# Altium PCB AQM with ESP32-C3.PcbDoc
Units mil, origin at the board's own origin, x right, y up, seen from the top; angles counter-clockwise.
Board outline 3325 x 2600 mil, 2 copper layers (Top Layer, Bottom Layer); 60 components, 44 nets, 199 pads, 22 vias.
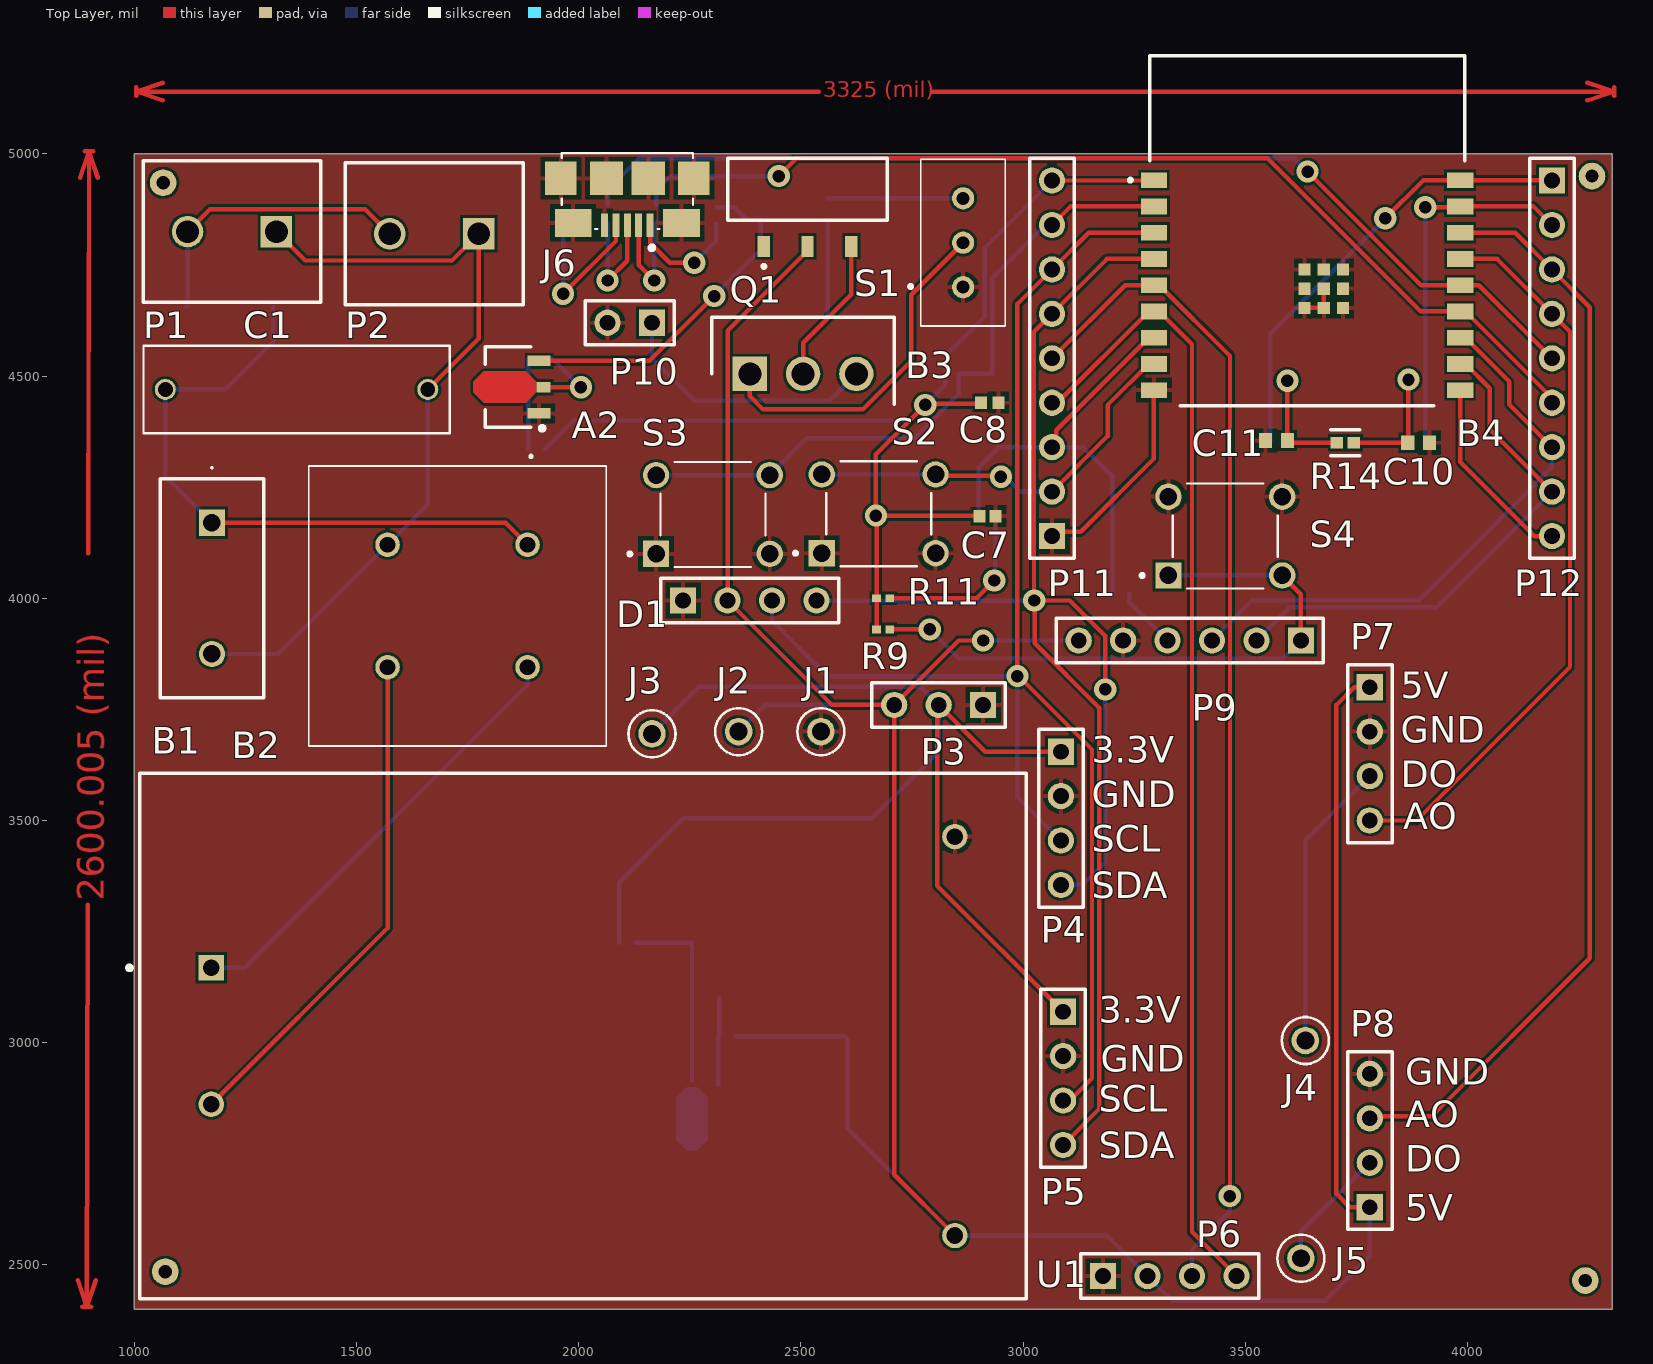
[diagram p0: Top Layer view]
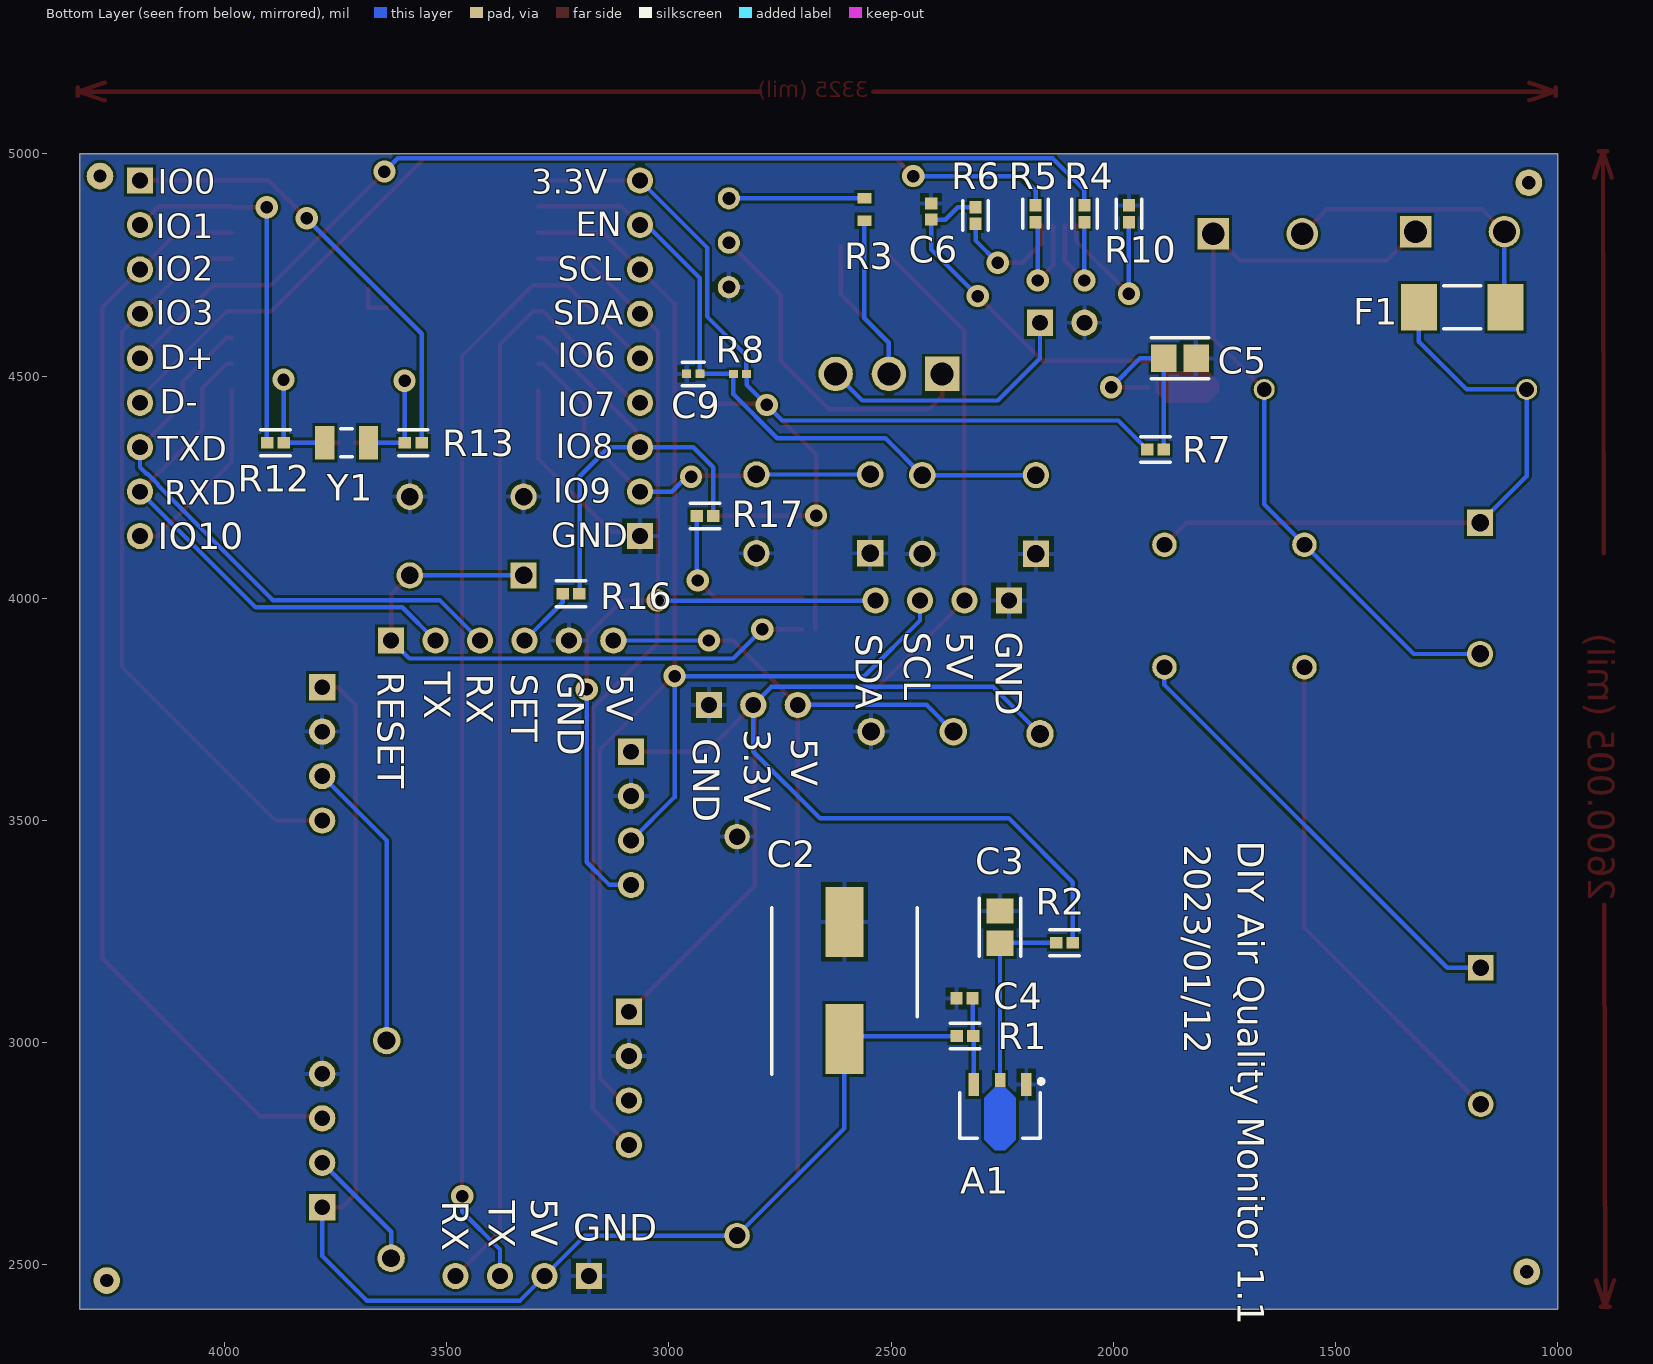
[diagram p1: Bottom Layer view, seen from below]
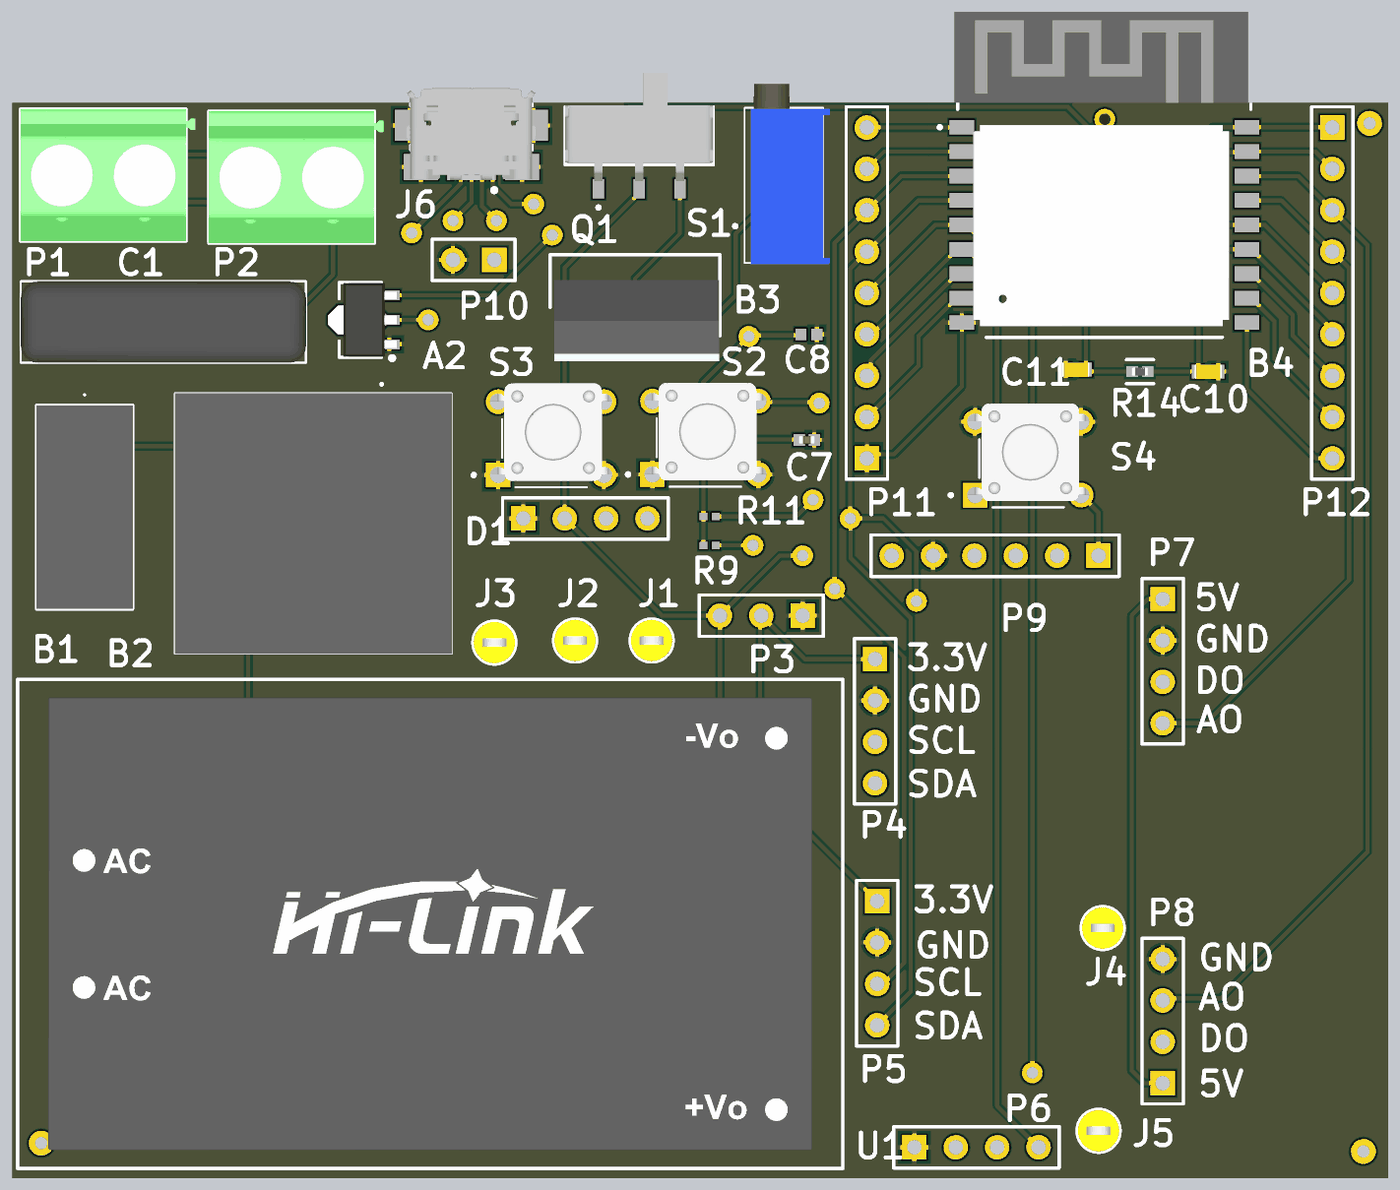
[diagram p2: 3D render of the assembled board from above, using the file's embedded part models]
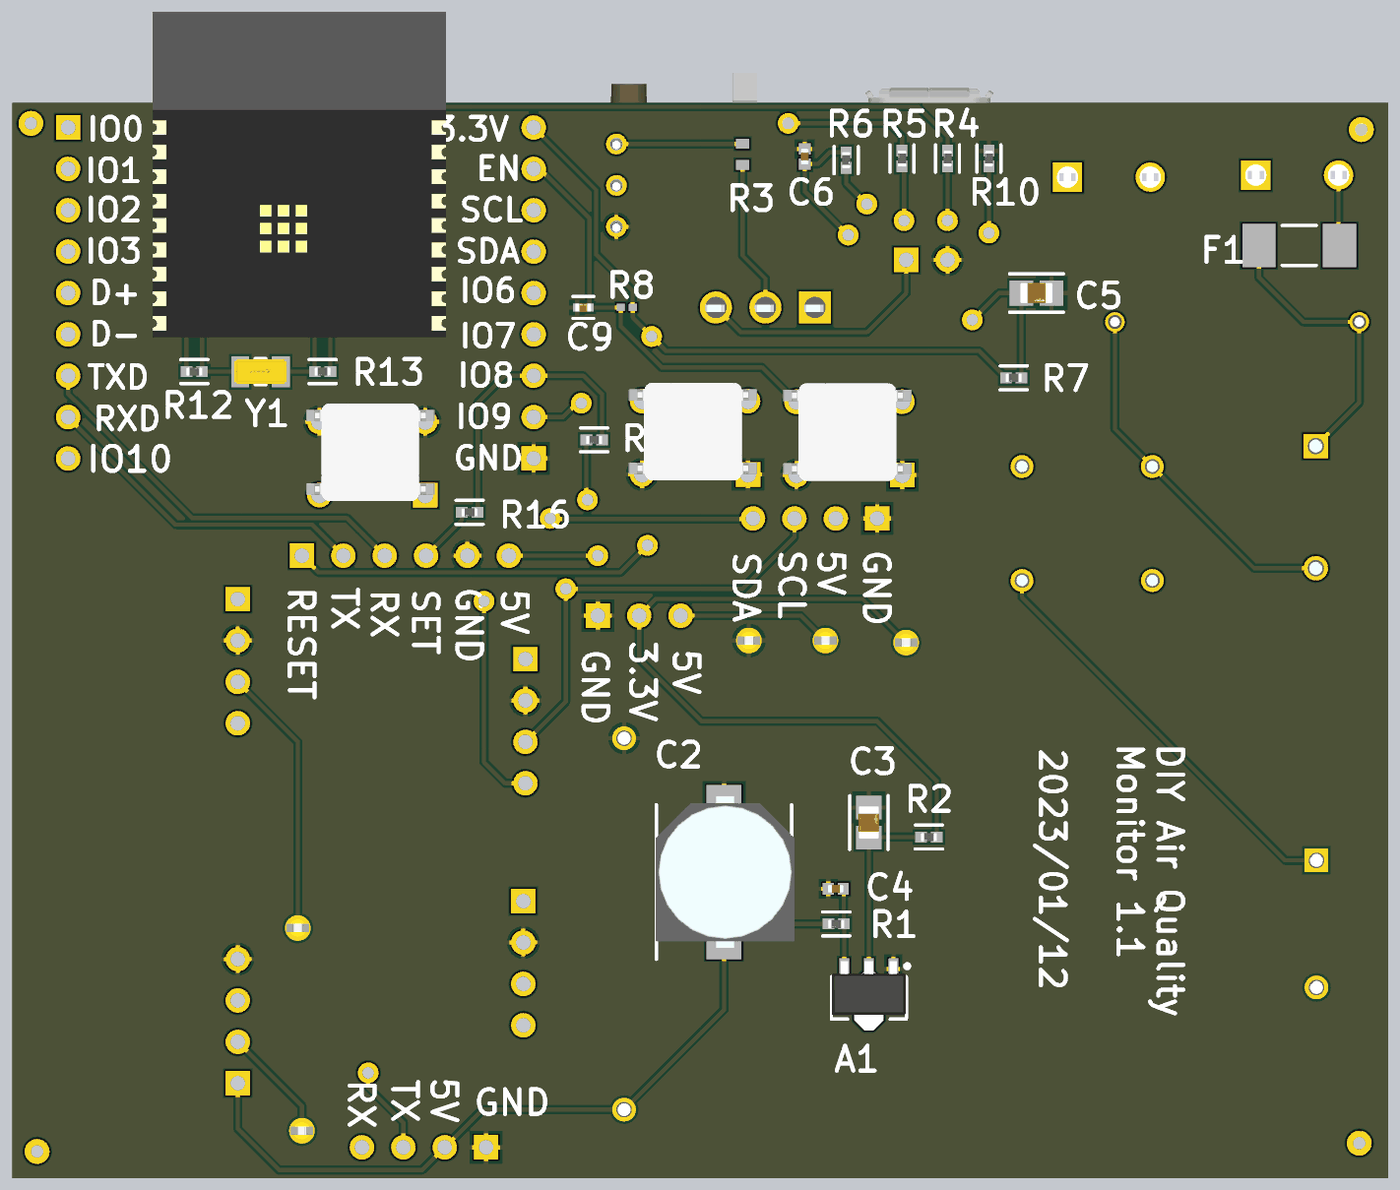
[diagram p3: 3D render of the assembled board from below, using the file's embedded part models]

## Layer stack, top to bottom
Top Solder: solder mask 0.4, Solder Resist, Dk 3.5
Top Layer: signal copper 1.4
Dielectric 1: dielectric 12.6, FR-4, Dk 4.8
Bottom Layer: signal copper 1.4
Bottom Solder: solder mask 0.4, Solder Resist, Dk 3.5

## Board outline
1000,2400 4325,2400 4325,5000 1000,5000

## Design rules (kind name [scope] priority, off if disabled: settings)
Clearance [All] p1: gap=5.98 ignorepadtopadclearanceinfootprint=FALSE
MinimumSolderMaskSliver [All] p1: minsoldermaskwidth=0.98
PolygonConnect [All] p1: connectstyle=Relief reliefconductorwidth=10 reliefentries=4 polygonreliefangle="90 Angle" airgapwidth=10
RoutingVias [All] p1: holewidth=28 width=50 viastyle="Through Hole" minholewidth=28 minwidth=50 maxholewidth=28 maxwidth=50
SilkToSilkClearance [All] p1: silktosilkclearance=1
SilkToSolderMaskClearance [IsPad] p1: minsilkscreentomaskgap=5 clearancetoexposedcopper=TRUE
SolderMaskExpansion [All] p1: expansion=4
Width [All] p1: maxlimit=12.01 minlimit=5.98 preferedwidth=10
27 further rules are at their usual default settings.

## Classes and differential pairs
component class "esp32-c3 module": A2 B4 C5 C6 C7 C8 C9 C10 C11 J6 P11 P12 R4 R5 R6 R7 R8 R10 R11 R12 R13 R14 R17 S2 S3 Y1
component class "AQM with esp32": A1 B1 B2 B3 C1 C2 C3 C4 D1 F1 J1 J2 J3 J4 J5 P1 P2 P3 P4 P5 P6 P7 P8 P9 P10 Q1 R1 R2 R3 R9 R16 S1 S4 U1

## Components (designator, comment, footprint, x,y, rotation, side; value= is the part's Value field where it differs from the comment)
A1 "IC1" SOT89-150P350X150-3N 2255,2845 r270 bottom
A2 "IC1" SOT89-150P350X150-3N 1850,4475 r180 top
B1 "10D561K" 10D561K 1175,4170 r270 top
B2 "UU9.8Y-10MH" UU98Y10MH 1884.96,4120.59 r90 top
B3 "3296X-1-103" 3296X1223LF 2865,4800 r0 top
B4 "ESP32-C3-WROOM-02-N4" ESP32C3WROOM02N4 3676.69,4696.69 r0 top
C1 "0.1uF" MPX-104K275VAC-C-D2 1365.28,4470 r0 top
C2 "220uF" CAPAE830X1050N 2605,3140 r90 bottom
C3 "22uF" FP-GRM219-0_2-0_15-IPC_A 2255,3260 r90 bottom
C4 "10uF" CL05A106MQ5NUNC 2335,3100 r180 bottom
C5 "22uF" FP-GRM219-0_2-0_15-IPC_A 1850,4540 r180 bottom
C6 "10uF" CL05A106MQ5NUNC 2410,4870 r270 bottom
C7 "10uF" CL05A106MQ5NUNC 2920,4185 r0 top
C8 "100nF" CAPC1050X55X23ML05T13 2925,4440 r0 top
C9 "1uF" FP-CL511-IPC_C 2945,4505 r0 bottom
C10 "12pF" CAPC1608X90X30LL10T20 3890,4350 r0 top
C11 "12pF" CAPC1608X90X30LL10T20 3570,4355 r180 top
D1 "Display" HDR1X4 2235,3995 r0 top
F1 "S6125-M2-0.5A" CAPC6125X25N 1215,4655 r0 bottom
J1 "5004" FP-5004-MFG 2545,3700 r0 top
J2 "5004" FP-5004-MFG 2360,3700 r0 top
J3 "5004" FP-5004-MFG 2165,3695 r0 top
J4 "5004" FP-5004-MFG 3635,3005 r0 top
J5 "5004" FP-5004-MFG 3625,2515 r0 top
J6 "10118192-0001LF" AMPHENOL_10118192-0001LF 2109.61,4839.69 r180 top
P1 "AC suppy" PHOE-1729128-2_V 1220,4825 r180 top
P2 "uv lamp" PHOE-1729128-2_V 1675,4820 r180 top
P3 "Header 3" HDR1X3 2910,3760 r180 top
P4 "Hum/Tem Sensor" HDR1X4 3085,3655 r270 top
P5 "CO2/VOC sensor" HDR1X4 3090,3070 r270 top
P6 "CH2O sensor" HDR1X4 3180,2475 r0 top
P7 "CO sensor" HDR1X4 3780,3800 r270 top
P8 "O3 sensor" HDR1X4 3780,2630 r90 top
P9 "PMS5003" HDR1X6 3625,3905 r180 top
P10 "5V FAN" HDR1X2 2165,4620 r180 top
P11 "Header 9" HDR1X9 3065,4140 r90 top
P12 "Header 9" HDR1X9 4190,4940 r270 top
Q1 "2SD313" TO304P498X1010X2089-3P 2385.32,4505 r0 top
R1 "0R" FP-RC0402-0_4-IPC_A 2333.84,3015 r0 bottom
R2 "0R" FP-RC0402-0_4-IPC_A 2110,3225 r0 bottom
R3 "470Ω" RESC1608X55X25LL10T15 2560,4875 r270 bottom value=470O
R4 "0R" FP-RC0402-0_4-IPC_A 2065,4865 r90 bottom
R5 "0R" FP-RC0402-0_4-IPC_A 2175,4865 r90 bottom
R6 "0R" FP-RC0402-0_4-IPC_A 2310,4861.16 r270 bottom
R7 "0R" FP-RC0402-0_4-IPC_A 1905,4335 r0 bottom
R8 "10kΩ" RESC1005X40X25LL05T10 2840,4505 r0 bottom value=10kO
R9 "10kΩ" RESC1005X40X25LL05T10 2685,3930 r0 top value=10kO
R10 "0R" FP-RC0402-0_4-IPC_A 1965,4865 r90 bottom
R11 "10kΩ" RESC1005X40X25LL05T10 2685,4000 r0 top value=10kO
R12 "0R" FP-RC0402-0_4-IPC_A 3885,4350 r180 bottom
R13 "0R" FP-RC0402-0_4-IPC_A 3575,4350 r0 bottom
R14 "0R" FP-RC0402-0_4-IPC_A 3725,4350 r0 top
R16 "0R" FP-RC0402-0_4-IPC_A 3220,4010 r0 bottom
R17 "0R" FP-RC0402-0_4-IPC_A 2918.84,4185 r0 bottom
S1 "Switch" SK3245SL1A 2515,4920 r0 top
S2 "TL1105AF160Q" TL1105AF160Q 2675,4190 r0 top
S3 "TL1105AF160Q" TL1105AF160Q 2302.05,4188.58 r0 top
S4 "TL1105AF160Q" TL1105AF160Q 3455,4140 r0 top
U1 "HLK-10M05" FP-HLK-10M05-MFG 2010,3015 r0 top
Y1 "32.768kHz" FP-ABS07-MFG 3725,4350 r0 bottom

## Footprints (in the part's own frame and the unit in brackets; to place one, negate y for a bottom-side part, rotate by r counter-clockwise, add the part's x,y. Pads: shape width x height; smd on the part's side, far side on the other; paste and mask are expansions set on the pad)
10D561K [mm]
  rect 1.5x1.5 hole 1: 1(0,0)
  round 1.5 hole 1: 2(7.5,0)
  silkscreen extent -3.2,-2.95 10,2.95, body extent -2.5,-2.95 10,2.95, height 15.6
3296X1223LF [mm]
  round 1.269 hole 0.74: 1(0,-2.54) 2(0,0) 3(0,2.54)
  silkscreen extent -3.1,-4.76 2.41,4.76, body extent -2.03,-4.83 2.8,6.22, height 10.03
AMPHENOL_10118192-0001LF [mm]
  rect 0.4x1.35 smd: 1(-1.3,0) 2(-0.65,0) 3(0,0) 4(0.65,0) 5(1.3,0)
  rect 2.1x1.6 smd: SH1(-3.1,-0.125) SH2(3.1,-0.125)
  rect 1.8x1.9 smd: SH3(-3.8,-2.675) SH6(3.8,-2.675)
  rect 1.9x1.9 smd: SH4(-1.2,-2.675) SH5(1.2,-2.675)
  silkscreen extent -3.75,-4.12 3.75,1.4, body extent -3.94,-4.99 3.98,0.67, height 3.09
CAPAE830X1050N [mm]
  rect 4x2.15 smd: 1(-3.35,0) 2(3.35,0)
  silkscreen extent -5.35,-4.15 4.15,4.15, body extent -4.65,-4.32 4.65,4.18, height 10.5
CAPC1050X55X23ML05T13 [mm] "Chip Capacitor, 2-Leads, Body 1.05x0.55mm, IPC Low Density"
  rect 0.69x0.72 smd: 1(-0.49,0) 2(0.49,0)
  body extent -0.53,-0.28 0.53,0.27, height 0.55
CAPC1608X90X30LL10T20 [mm] "Chip Capacitor, 2-Leads, Body 1.70x0.90mm, IPC High Density"
  rect 0.75x0.85 smd: 1(-0.625,0) 2(0.625,0)
  body extent -0.85,-0.45 0.85,0.45, height 0.9
CAPC6125X25N [mm] "Chip Capacitor, 2-Leads, Body 6.10x2.50mm, IPC Medium Density"
  rect 2.05x2.65 smd: 1(-2.475,0) 2(2.475,0)
  silkscreen extent -1.05,-1.22 1.05,1.22, body extent -3.15,-1.3 3.15,1.3, height 2.5
CL05A106MQ5NUNC [mm]
  rect 0.69x0.72 smd: 1(-0.46,0) 2(0.46,0)
  body extent -0.5,-0.25 0.5,0.25, height 0.7
ESP32C3WROOM02N4 [mm]
  rect 1.5x0.9 smd: 1(-9.71,6.2) 2(-9.71,4.7) 3(-9.71,3.2) 4(-9.71,1.7) 5(-9.71,0.2) 6(-9.71,-1.3) 7(-9.71,-2.8) 8(-9.71,-4.3) 9(-9.71,-5.8) 10(7.79,-5.8) 11(7.79,-4.3) 12(7.79,-2.8) 13(7.79,-1.3) 14(7.79,0.2) 15(7.79,1.7) 16(7.79,3.2) 17(7.79,4.7) 18(7.79,6.2)
  rect 0.7x0.7 smd: 19(0,0) 20(1.1,0) 21(1.1,1.1) 22(0,1.1) 23(-1.1,1.1) 24(-1.1,0) 25(-1.1,-1.1) 26(0,-1.1) 27(1.1,-1.1)
  silkscreen extent -11.16,-6.7 8.04,13.3, body extent -10.14,-6.73 7.86,13.27, height 1.6
FP-5004-MFG [mm]
  round 1.57 hole 1.02 paste-1000 mask+0: 1(0,0)
  silkscreen extent -1.35,-1.34 1.35,1.34, body extent -1.45,-1.45 1.45,1.45, height 0.25
FP-ABS07-MFG [mm]
  rect 1.1x1.9 smd paste+0 mask+0: 1(-1.25,0) 2(1.25,0)
  silkscreen extent -0.33,-0.8 0.33,0.8, body extent -1.6,-0.75 1.6,0.75, height 0.9
FP-CL511-IPC_C [mil]
  rect 20.29x18.6 smd paste+0 mask+0: 1(-14.9,0) 2(14.9,0)
  silkscreen extent -25,-27 25,27, body extent -20,-10 20,10, height 22
FP-GRM219-0_2-0_15-IPC_A [mil]
  rect 57.27x61.27 smd paste+0 mask+0: 1(-36.45,0) 2(36.45,0)
  silkscreen extent -65,-46 65,46, body extent -39,-25 39,25, height 39
FP-HLK-10M05-MFG [mm]
  rect 1.45x1.45 hole 0.95 paste-1000 mask+0: 1(-21.25,3.9)
  round 1.45 hole 0.95 paste-1000 mask+0: 2(-21.25,-3.9) 3(21.25,11.4) 4(21.25,-11.4)
  silkscreen extent -26.05,-15.01 25.33,15.01, body extent -25.43,-15.11 25.43,15.11, height 0.25
FP-RC0402-0_4-IPC_A [mil]
  rect 28.16x26.48 smd paste+0 mask+0: 1(-18.84,0) 2(18.84,0)
  silkscreen extent -33,-29 33,29, body extent -20,-10 20,10, height 16
HDR1X2 [mm] "Connector; Header; 2 Position"
  rect 1.5x1.5 hole 0.9: 1(0,0)
  round 1.5 hole 0.9: 2(2.54,0)
  silkscreen extent -1.27,-1.27 3.81,1.27
HDR1X3 [mm] "Connector; Header; 3 Position"
  rect 1.5x1.5 hole 0.9: 1(0,0)
  round 1.5 hole 0.9: 2(2.54,0) 3(5.08,0)
  silkscreen extent -1.27,-1.27 6.35,1.27
HDR1X4 [mm] "Connector; Header; 4 Position"
  rect 1.5x1.5 hole 0.9: 1(0,0)
  round 1.5 hole 0.9: 2(2.54,0) 3(5.08,0) 4(7.62,0)
  silkscreen extent -1.27,-1.27 8.89,1.27
HDR1X6 [mm] "Connector; Header; 6 Position"
  rect 1.5x1.5 hole 0.9: 1(0,0)
  round 1.5 hole 0.9: 2(2.54,0) 3(5.08,0) 4(7.62,0) 5(10.16,0) 6(12.7,0)
  silkscreen extent -1.27,-1.27 13.97,1.27
HDR1X9 [mm] "Connector; Header; 9 Position"
  rect 1.5x1.5 hole 0.9: 1(0,0)
  round 1.5 hole 0.9: 2(2.54,0) 3(5.08,0) 4(7.62,0) 5(10.16,0) 6(12.7,0) 7(15.24,0) 8(17.78,0) 9(20.32,0)
  silkscreen extent -1.27,-1.27 21.59,1.27
MPX-104K275VAC-C-D2 [mm]
  round 1.2 hole 0.85: 1(-7.5,0) 2(7.5,0)
  silkscreen extent -8.75,-2.5 8.75,2.5, body extent -8.75,-2.5 8.75,2.5, height 12
PHOE-1729128-2_V [mm] "Receptacle, 2-Leads, Body 8.1x10.16mm, Pitch 5.08mm"
  rect 1.8x1.8 hole 1.3: 1(-2.54,0)
  round 1.8 hole 1.3: 2(2.54,0)
  silkscreen extent -5.08,-4.05 5.08,4.05, body extent -5.65,-4.05 5.08,4.05, height 10.01
RESC1005X40X25LL05T10 [mm] "Chip Resistor, 2-Leads, Body 1.00x0.50mm, IPC High Density"
  rect 0.5x0.45 smd: 1(-0.375,0) 2(0.375,0)
  body extent -0.53,-0.27 0.53,0.28, height 0.4
RESC1608X55X25LL10T15 [mm] "Chip Resistor, 2-Leads, Body 1.70x0.90mm, IPC High Density"
  rect 0.6x0.8 smd: 1(-0.65,0) 2(0.65,0)
  body extent -0.85,-0.45 0.85,0.45, height 0.55
SK3245SL1A [mm]
  rect 0.7x1.2 smd: 1(-2.5,-3.25) 2(0,-3.25) 3(2.5,-3.25)
  silkscreen extent -4.55,-4.5 4.55,1.78, body extent -4.55,-3.62 4.55,3.88, height 3.2
SOT89-150P350X150-3N [mm] "SOT89, 3-Leads, Body 4.50x2.50mm, Pitch 1.50mm, Lead Span 3.5mm, IPC Medium Density"
  rect 1.3x0.6 smd: 1(-1.55,1.5) 3(-1.55,-1.5)
  rect 0.8x0.6 smd: 2(-1.8,0)
  Top Layer region: -1.4,0.3 -0.8,0.9 1.6,0.9 2.2,0.3 2.2,-0.3 1.6,-0.9 -0.8,-0.9 -1.4,-0.3
  silkscreen extent -1.85,-2.3 1.53,2.47, body extent -2.02,-2.27 2.22,2.27, height 1.5
TL1105AF160Q [mm]
  rect 1.508x1.508 / inner round 1.508 / far side rect 1.508x1.508 hole 1: 1(-3.25,-2.25)
  round 1.508 hole 1: 2(3.25,-2.25) 3(-3.25,2.25) 4(3.25,2.25)
  silkscreen extent -4.85,-3 3,3, body extent -3.82,-2.62 4.07,3.38, height 3.21
TO304P498X1010X2089-3P [mm]
  rect 1.965x1.965 / inner round 1.965 / far side rect 1.965x1.965 hole 1.31: 1(0,0)
  round 1.965 hole 1.31: 2(3.04,0) 3(6.08,0)
  silkscreen extent -2.17,-1.74 8.25,3.25, body extent -1.91,-3.3 8.19,1.68, height 19.12
UU98Y10MH [mm]
  round 1.4 hole 0.9: 1(0,0) 2(-7,0) 3(-7,8) 4(0,8)
  silkscreen extent -11.5,-4.5 5.1,12.5, body extent -11.5,-4.5 4.5,12.5, height 14.1

## Part data
A1 A2: library part IC?, "75dB@(120Hz) 1A 1.25V@(1A) ±125?@(Tj) Fixed 3.3V~3.3V Positive 1 20V SOT-89 Linear Voltage Regulators (LDO) ROHS", LCSC Part #=C2904742, Manufacturer=YONGYUTAI, Mfr. Part #=AMS1117-3.3, Package=SOT-89, Datasheet=https://datasheet.lcsc.com/lcsc/2110121330_YONGYUTAI-AMS1117-3-3_C2904742.pdf
B1: "920V 42.3J 180pF@1kHz 460V 350V 504V~616V 2.5kA Plugin Varistors ROHS", LCSC Part #=C113236, Manufacturer="Hongzhi Elec", Package=Plugin, Datasheet=https://datasheet.lcsc.com/lcsc/1811141751_Hongzhi-Elec-10D561K_C113236.pdf, Mfr. Part #=10D561K
B2: "10mH@1kHz 1.2O 2 500mA 50V Plugin Common Mode Filters ROHS", LCSC Part #=C75192, Manufacturer="FH (Guangdong Fenghua Advanced Tech)", Package=Plugin, Datasheet=https://datasheet.lcsc.com/lcsc/1810311213_FH--Guangdong-Fenghua-Advanced-Tech-UU9-8Y-10mH_C75192.pdf, Mfr. Part #=UU9.8Y-10MH
B3: "±10% 10kO Plugin Variable Resistors/Potentiometers ROHS", LCSC Part #=C118955, Manufacturer="BOCHEN(Chengdu Guosheng Tech)", Package=Plugin, Datasheet=https://datasheet.lcsc.com/lcsc/1811011704_BOCHEN-Chengdu-Guosheng-Tech-3296X-1-103_C118955.pdf, Mfr. Part #=3296X-1-103
B4: "WiFi Modules (802.11) (Engineering Samples) SMD module, ESP32-C3, 4MB SPI flash, PCB antenna, -40 C +85 C", LCSC Part #=C2934560, Manufacturer="Espressif Systems", Datasheet=https://www.espressif.com/sites/default/files/documentation/esp32-c3-wroom-02_datasheet_en.pdf, Mfr. Part #=ESP32-C3-WROOM-02-N4
C1: "X2 100nF ±10% 275V Plugin,P=15mm Suppression Capacitors ROHS", LCSC Part #=C914484, Manufacturer=NDF, Mfr. Part #=X2-104K-275VAC, Package=Plugin,P=15mm, Datasheet=https://datasheet.lcsc.com/lcsc/2201131300_NDF-X2-104K-275VAC_C914484.pdf
C2: library part UUR1C221MNL1GS, "-40?~+85? 2000hrs@85? 220uF 10mm 16V 8mm 215mA@120Hz ±20% SMD,D8xL10mm Aluminum Electrolytic Capacitors - SMD ROHS", LCSC Part #=C445237, Manufacturer=Nichicon, Package=SMD,D8xL10mm, Datasheet=https://datasheet.lcsc.com/lcsc/2002121532_Nichicon-UUR1C221MNL1GS_C445237.pdf, Mfr. Part #=UUR1C221MNL1GS
C3 C5: library part CMP-06035-056251-1, "Chip Multilayer Ceramic Capacitors for General Purpose, 0805, 22uF, X5R, 15%, 20%, 16V", LCSC Part #=C162295, Manufacturer="Murata Electronics", Mfr. Part #=GRM219R61C226ME15L, Package=0805, Datasheet=https://datasheet.lcsc.com/lcsc/1811141821_Murata-Electronics-GRM219R61C226ME15L_C162295.pdf
C4 C6 C7: library part CL05A106MQ5NUNC, "6.3V 10uF X5R ±20% 0402 Multilayer Ceramic Capacitors MLCC - SMD/SMT ROHS", LCSC Part #=C15525, Manufacturer="Samsung Electro-Mechanics", Package=0402, Datasheet Link=https://datasheet.datasheetarchive.com/originals/distributors/Datasheets-DGA10/2406160.pdf, Mfr. Part #=CL05A106MQ5NUNC
C8: library part CMP-2000-05439-1, "X7R 100nF 16V ±10% 0402 Multilayer Ceramic Capacitors MLCC - SMD/SMT ROHS", LCSC Part #=C1525, Manufacturer="Samsung Electro-Mechanics", Mfr. Part #=CL05B104KO5NNNC, Package=0402, Datasheet=https://datasheet.lcsc.com/lcsc/1810191219_Samsung-Electro-Mechanics-CL05B104KO5NNNC_C1525.pdf
C9: library part CMP-13271-001936-1, "X5R 10V 1uF ±10% 0402 Multilayer Ceramic Capacitors MLCC - SMD/SMT ROHS", LCSC Part #=C14445, Manufacturer="Samsung Electro-Mechanics", Mfr. Part #=CL05A105KP5NNNC, Package=0402, Datasheet=https://datasheet.lcsc.com/lcsc/1810191214_Samsung-Electro-Mechanics-CL05A105KP5NNNC_C14445.pdf
C10 C11: library part CMP-2000-06098-1, "50V 12pF C0G ±5% 0603 Multilayer Ceramic Capacitors MLCC - SMD/SMT ROHS", LCSC Part #=C38523, Manufacturer="Samsung Electro-Mechanics", Mfr. Part #=CL10C120JB8NNNC, Package=0603, Datasheet=https://datasheet.lcsc.com/lcsc/1810261515_Samsung-Electro-Mechanics-CL10C120JB8NNNC_C38523.pdf
D1: library part "Header 4", "Header, 4-Pin", LatestRevisionDate=17-Jul-2002, LatestRevisionNote="Re-released for DXP Platform.", Publisher="Altium Limited"
F1: "SMD Fuses ROHS", LCSC Part #=C845172, Manufacturer="SART(Nanjing Sart Tech)", Package=SMD, Datasheet=https://datasheet.lcsc.com/lcsc/2201242130_SART-Nanjing-Sart-Tech-S6125-M2-0-5A_C845172.pdf, Mfr. Part #=S6125-M2-0.5A
J1 J2 J3 J4 J5: library part CMP-2000-05575-2, "PC TEST POINT MINIATURE YELLOW", LCSC Part #=C2906762, Manufacturer=Keystone, ComponentLink2Description=Datasheet, ComponentLink2URL=https://www.keyelco.com/product-pdf.cfm?p=1313, Datasheet=https://datasheet.lcsc.com/lcsc/2201121200_Keystone-5004_C2906762.pdf, Mfr. Part #=5004, Package=5004
J6: "Single Port 5 Contact Horizontal Right Angle Shielded Micro B USB 2.0 Connector", LCSC Part #=C132564, Manufacturer="Amphenol ICC", Package=SMD, Datasheet=https://datasheet.lcsc.com/lcsc/2111290930_Amphenol-ICC-10118192-0001LF_C132564.pdf, Mfr. Part #=10118192-0001LF
P1 P2: library part CMP-2000-05815-1, "13.5A 400V Green Straight pin 5.08mm 1 2 Plugin,P=5.08mm Screw terminal ROHS", LCSC Part #=C91153, Manufacturer="Phoenix Contact", Mfr. Part #=1729128, Package=Plugin,P=5.08mm, Datasheet=https://www.farnell.com/datasheets/2617011.pdf
P3: "Header, 3-Pin", LatestRevisionDate=17-Jul-2002, LatestRevisionNote="Re-released for DXP Platform.", Publisher="Altium Limited"
P4: library part "Header 4", "Si7021 Header, 4-Pin"
P5: library part "Header 4", "SGP30 Header, 4-Pin", LatestRevisionDate=17-Jul-2002, LatestRevisionNote="Re-released for DXP Platform.", Publisher="Altium Limited"
P6: library part "Header 4", "- Sensor Modules ROHS", LCSC Part #=C141344, Manufacturer="Zhengzhou Winsen Elec Tech", Mfr. Part #=ZE08-CH2O
P7: library part "Header 4", "MQ7 Header, 4-Pin", LatestRevisionDate=17-Jul-2002, LatestRevisionNote="Re-released for DXP Platform.", Publisher="Altium Limited"
P8: library part "Header 4", "MQ131 Header, 4-Pin", LatestRevisionDate=17-Jul-2002, LatestRevisionNote="Re-released for DXP Platform.", Publisher="Altium Limited"
P9: library part "Header 6", "PMS5003 Sensor Modules ROHS", LCSC Part #=C91431, Manufacturer="Beijing Plantower", Datasheet=https://datasheet.lcsc.com/lcsc/1810251510_Beijing-Plantower-PMS5003_C91431.pdf, Mfr. Part #=PMS5003, Package=PMS5003
P10: library part "Header 2", "Header, 2-Pin", LatestRevisionDate=17-Jul-2002, LatestRevisionNote="Re-released for DXP Platform.", Publisher="Altium Limited"
P11 P12: "Header, 9-Pin", LatestRevisionDate=17-Jul-2002, LatestRevisionNote="Re-released for DXP Platform.", Publisher="Altium Limited"
Q1: "NPN Transistor, TO-220", LCSC Part #=C3031919, Manufacturer="Jiangsu Changjing Electronics Technology Co., Ltd.", Package=TO-220, Datasheet=https://datasheet.lcsc.com/lcsc/2206081730_Jiangsu-Changjing-Electronics-Technology-Co---Ltd--2SD313_C3031919.pdf, Mfr. Part #=2SD313
R1 R2 R4 R5 R6 R7 R10 R12 R13 R14 R16 R17: library part CMP-2002-07342-2, "RES SMD 0 OHM JUMPER 1/16W 0402", LCSC Part #=C106231, Manufacturer=Yageo, Mfr. Part #=RC0402FR-070RL, Package=0402, Datasheet=https://www.lcsc.com/product-detail/Chip-Resistor-Surface-Mount_YAGEO-RC0402FR-070RL_C106231.html
R3: library part CMP-1659-00035-2, "100mW Thick Film Resistors 75V ±100ppm/? ±1% -55?~+155? 470O 0603 Chip Resistor - Surface Mount ROHS", LCSC Part #=C114669, Manufacturer=YAGEO, Mfr. Part #=RC0603FR-07470RL, Package=0603, ComponentLink1Description="Manufacturer URL", ComponentLink1URL=http://www.yageo.com/, ComponentLink2Description=Datasheet, ComponentLink2URL=https://datasheet.ciiva.com/11808/0900766b80f96399-11808177.pdf, Datasheet=https://datasheet.lcsc.com/lcsc/1810161617_YAGEO-RC0603FR-07470RL_C114669.pdf
R8 R9 R11: library part CMP-2002-07353-1, "50V 10kO Thick Film Resistors 62.5mW ±1% -55?~+155? ±100ppm/? 0402 Chip Resistor - Surface Mount ROHS", LCSC Part #=C60490, Manufacturer=YAGEO, Mfr. Part #=RC0402FR-0710KL, Package=0402
S1: library part SK-3245S-L1-A, "Surface Mount 50mA DPDT 3.2mm 12V 9.1mm 12V 3.55mm 50mA 10000 SMDSplicing Rectangular columnar -40?~+85? Black SMD Slide Switches ROHS", LCSC Part #=C405951, Manufacturer="XKB Connectivity", Package=SMD, Datasheet=https://datasheet.lcsc.com/lcsc/2002271841_XKB-Connectivity-SK-3245S-L1-A_C405951.pdf, Mfr. Part #=SK-3245S-L1-A
S2 S3 S4: "6mm 1.4mm Round Button 50mA Straight 6mm SPST 12V Plugin,6x6mm Tactile Switches ROHS", LCSC Part #=C273465, Manufacturer=E-Switch, Package=Plugin,6x6mm, Datasheet=https://datasheet.lcsc.com/lcsc/1809291031_E-Switch-TL1105AF160Q_C273465.pdf, Mfr. Part #=TL1105AF160Q
U1: library part CMP-218581-000001-1, "5V 2A 90VAC~265VAC 1 120V~350V Isolated Regulated 10W AC-DC 80% Plugin Power Modules ROHS", LCSC Part #=C403745, Manufacturer=HI-LINK, Package=Plugin, Mfr. Part #=HLK-10M05
Y1: library part CMP-0447-00001-4, "-40?~+85? 32.768kHz 12.5pF 70kO ±20ppm SMD3215-2P Crystals ROHS", LCSC Part #=C130253, Manufacturer="Abracon LLC", Mfr. Part #=ABS07-32.768KHZ-T, Package=SMD3215-2P, Datasheet=https://datasheet.lcsc.com/lcsc/1809211224_Abracon-LLC-ABS07-32-768KHZ-T_C130253.pdf

## Free pads (board coordinates)
  round 60 hole 30: 2(1065,4935) 3(4280,4950) 4(4265,2465) 5(1070,2485)

## Via types
v1: diameter 50, hole 28, Top Layer to Bottom Layer, 22 vias

## Nets (pads, with @x,y where several pads share a name; then routed paths per layer and width w, separated by ;. In a path a pad name is that pad's centre, name@x,y a point inside that pad or via, vN(x,y) a via of type N, cw(c..) or ccw(c..) an arc to the next point about the centre after c; other vN are vias at no path point)
3.3V: J3.1 P3.2 P4.1 P5.1 R2.1 | length 2914.1
  Top Layer w10: P4.1 2915,3655 P3.2 2807.09,3757.09 2807.09,3352.91 P5.1
  Bottom Layer w10: R2.1 2091.16,3361.16 2235,3505 2660,3505 2810,3655 P3.2 2769.49,3800.51 2270.51,3800.51 J3.1
5V: C2.1 D1.2 J2.1 P3.3 P6.2 P7.1 P8.1 P9.6 R1.2 S1.2 U1.4 | length 6665.8
  Top Layer w10: S1.2 2515,4782.21 2335,4602.21 D1.2 2570,3760 P3.3 ; U1.4 2710,2702.8 P3.3 ; v1(2910,3905) 2855,3905 P3.3 ; P8.1 3735,2630 3705,2660 3705,3760 3745,3800 P7.1
  Bottom Layer w10: R1.2 2598.11,3015 C2.1 2605,2807.8 U1.4 3188.82,2566.18 P6.2 3335,2420 3680,2420 3780,2520 P8.1 ; J2.1 2420,3760 P3.3 ; v1(2910,3905) P9.6
D+: B4.14 P12.5 R4.2 | length 2375.5
  Top Layer w10: v1(3640,4960) 3895.43,4704.57 B4.14 4025.43,4704.57 P12.5
  Bottom Layer w10: R4.2 2065,4918.23 2136.77,4990 3610,4990 v1(3640,4960)
D-: B4.13 P12.6 R5.2 | length 2313.2
  Top Layer w10: v1(2450,4950) 2490,4990 3550,4990 3894.49,4645.51 B4.13 3995.2,4645.51 4190,4450.71 P12.6
  Bottom Layer w10: R5.2 2175,4918.23 2206.77,4950 v1(2450,4950)
DOUT1: J4.1 P7.3 | length 655.1
  Bottom Layer w10: J4.1 3635,3455 P7.3
DOUT2: J5.1 P8.2 | length 279.2
  Bottom Layer w10: J5.1 3625,2575 P8.2
EN: B4.2 C9.1 P11.8 R8.2 S3.3 S3.4 | length 1523.8
  Top Layer w10: P11.8 3106.73,4881.73 B4.2
  Bottom Layer w10: S3.3 S3.4 2512.84,4360 2755.89,4360 2854.76,4458.88 R8.2 C9.1 2930.1,4720.1 3050,4840 P11.8
GND: A1.1 A2.1 B3.1 B4.9 B4.19 B4.20 B4.21 B4.22 B4.23 B4.24 B4.25 B4.26 B4.27 C2.2 C3.2 C4.1 C5.2 C6.1 C7.2 C8.2 C9.2 C10.2 C11.2 D1.1 J1.1 J6.5 J6.SH1 J6.SH2 J6.SH3 J6.SH4 J6.SH5 J6.SH6 P3.1 P4.2 P5.2 P6.1 P7.2 P8.4 P9.5 P10.2 P11.1 R10.2 S2.1 S2.2 S3.1 S3.2 S4.3 S4.4 U1.3 | length 542.2
  Top Layer w10: P11.1 3075,4150 3130,4150 3294.41,4314.41 B4.9 ; B4.25 B4.26 B4.19
IO0: B4.18 P12.1 R13.1 | length 1023.1
  Top Layer w10: v1(3815,4855) 3900.79,4940.79 B4.18 4189.21,4940.79 P12.1
  Bottom Layer w10: R13.1 3556.16,4594.91 3815,4853.75 v1(3815,4855)
IO1: B4.17 P12.2 R12.1 | length 833.5
  Top Layer w10: v1(3905,4880) 3981.65,4880 B4.17 4148.27,4881.73 P12.2
  Bottom Layer w10: R12.1 3904.42,4350.58 3904.42,4879.42 v1(3905,4880)
IO2: B4.16 P8.3 P12.3 | length 2470.2
  Top Layer w10: P8.3 3785,2835 3920,2835 4275,3190 4275,4655 P12.3 4107.32,4822.68 B4.16
IO3: B4.15 P7.4 P12.4 | length 1662.7
  Top Layer w10: P7.4 3885,3500 4230.51,3845.51 4230.51,4599.49 P12.4 4066.38,4763.62 B4.15
IO9: B4.8 P11.2 S2.3 S2.4 | length 928.9
  Top Layer w10: S2.4 2805.45,4276.08 2947.5,4276.08 v1(2950,4273.58) 2950,4277.16 v1@2948.58,4278.58 ; P11.2 3190,4365 3190,4434.8 3282.6,4527.4 B4.8
  Bottom Layer w10: S2.3 S2.4 ; v1(2950,4273.58) 2960,4273.58 2993.58,4240 P11.2
IO10: B4.10 P12.9 | length 437.4
  Top Layer w10: B4.10 3983.39,4306.61 4150,4140 P12.9
NetA1_2: A1.2 C3.1 R2.2 | length 434.4
  Bottom Layer w10: R2.2 2253.55,3225 C3.1 A1.2
NetA1_3: A1.3 C4.2 R1.1 | length 195.1
  Bottom Layer w10: A1.3 2314.53,2906.5 2314.53,3014.53 R1.1 2315.95,3015.95 2315.95,3099.05 C4.2
NetA2_2: A2.2 C5.1 R7.1 | length 434.7
  Top Layer w10: A2.2 v1(2005,4475)
  Bottom Layer w10: R7.1 1886.45,4335.29 C5.1 1940,4540 v1(2005,4475)
NetA2_3: A2.3 C6.2 R6.1 | length 781.5
  Top Layer w10: A2.3 1911.5,4534.53 2159.53,4534.53 v1(2305,4680)
  Bottom Layer w10: v1(2305,4680) 2410,4785 C6.2 2377.88,4851.89 2349.77,4880 R6.1
NetB1_1: B1.1 B2.1 C1.1 F1.2 | length 1438.4
  Top Layer w10: B1.1 1835.55,4170 B2.1
  Bottom Layer w10: B1.1 1070,4275 C1.1 1205,4470 1312.44,4577.44 F1.2
NetB1_2: B1.2 B2.4 C1.2 P1.1 P2.1 | length 1787.9
  Top Layer w10: P1.1 1385,4760 1715,4760 P2.1 1775,4584.45 C1.2
  Bottom Layer w10: B1.2 1324.13,3874.72 B2.4 1660.55,4211.14 C1.2
NetB2_2: B2.2 U1.1 | length 1015.2
  Bottom Layer w10: U1.1 1248.54,3168.54 1884.96,3804.96 B2.2
NetB2_3: B2.3 U1.2 | length 1147.8
  Top Layer w10: U1.2 1570,3258.07 B2.3
NetB3_2: B3.2 Q1.1 | length 785
  Top Layer w10: Q1.1 2385.32,4454.68 2415,4425 2639.14,4425 2748.25,4534.11 2748.25,4683.25 B3.2
NetB3_3: B3.3 R3.1 | length 305.2
  Bottom Layer w10: R3.1 2560.3,4900.3 2864.7,4900.3 B3.3
NetC10_1: C10.1 R12.2 R14.2 Y1.2 | length 498.9
  Top Layer w10: R14.2 C10.1 3866.26,4350.86 3866.26,4491.26 v1(3867.12,4492.12)
  Bottom Layer w10: Y1.2 R12.2 3866.16,4491.16 v1(3867.12,4492.12)
NetC11_1: C11.1 R13.2 R14.1 Y1.1 | length 477.2
  Top Layer w10: v1(3594.61,4489.61) C11.1 3599.61,4350 R14.1
  Bottom Layer w10: v1(3594.61,4489.61) 3594.22,4489.22 3594.22,4355.38 3588.84,4350 R13.2 Y1.1
NetF1_1: F1.1 P1.2 P2.2 | length 669.5
  Top Layer w10: P1.2 1170,4875 1520,4875 P2.2
  Bottom Layer w10: F1.1 1120,4657.44 P1.2
NetJ6_2: J6.2 R5.1 | length 272.3
  Top Layer w10: J6.2 2135.2,4749.8 v1(2170,4715)
  Bottom Layer w10: v1(2170,4715) 2170,4841.16 R5.1
NetJ6_3: J6.3 R4.1 | length 274.3
  Top Layer w10: v1(2065,4715) 2109.61,4759.61 J6.3
  Bottom Layer w10: v1(2065,4715) R4.1
NetP9_1: P9.1 R9.2 S4.1 S4.2 | length 1388.9
  Top Layer w10: R9.2 v1(2790,3930) ; S4.2 3625,4009.37 P9.1
  Bottom Layer w10: v1(2790,3930) 2855.51,3864.49 3584.49,3864.49 P9.1 ; S4.1 S4.2
NetP9_4: P9.4 R16.2 | length 140.7
  Bottom Layer w10: R16.2 3238.84,3991.16 P9.4
NetP10_1: P10.1 Q1.3 | length 603.9
  Bottom Layer w10: P10.1 2165,4540 2260,4445 2564.69,4445 Q1.3
NetQ1_2: Q1.2 R3.2 S1.3 | length 699.2
  Top Layer w10: Q1.2 2505,4575 2613.43,4683.43 S1.3
  Bottom Layer w10: Q1.2 2505,4575 2560,4630 R3.2
NetR11_2: R11.2 R17.2 | length 397.9
  Top Layer w10: R11.2 2895,4000 v1(2935,4040)
  Bottom Layer w10: v1(2935,4040) 2937.68,4042.68 R17.2
"OTG ID": J6.4 R10.1 | length 365.1
  Top Layer w10: v1(1965,4685) 2084.02,4804.02 J6.4
  Bottom Layer w10: v1(1965,4685) R10.1
RX0: B4.11 P9.2 P12.8 | length 1183.7
  Top Layer w10: B4.11 3995.2,4527.4 4050,4472.6 4050,4380 P12.8
  Bottom Layer w10: P9.2 3600,3980 3930,3980 P12.8
RX1: B4.5 P6.3 P11.5 | length 2640.4
  Top Layer w10: P11.5 3229.57,4704.57 B4.5 3306.22,4704.57 3465.51,4545.28 3465.51,2655.51 v1(3465,2655)
  Bottom Layer w10: P6.3 3380,2535 3465,2620 v1(3465,2655)
SCL: B4.3 D1.3 P4.3 P5.3 P11.7 | length 3331.9
  Top Layer w10: P5.3 3091.82,2871.82 3106.82,2871.82 3155,2920 3155,3659.59 2989.59,3825 v1(2987.29,3825) 2987.29,4662.29 P11.7 3147.68,4822.68 B4.3
  Bottom Layer w10: D1.3 2435,3950 2555,3830 2560,3825 v1(2987.29,3825) 2987.29,3552.71 P4.3
SDA: B4.4 D1.4 P4.4 P5.4 P11.6 | length 3575.6
  Top Layer w10: P5.4 3170.98,2850.98 3170.98,3754.02 3025.98,3899.02 3025.98,3994.02 v1(3025,3995) ; v1(3185,3795) 3184.49,3795.51 3184.49,3915.51 3105,3995 v1(3025,3995) ; B4.4 3188.62,4763.62 P11.6 3024.49,4599.49 3024.49,3995.51 v1(3025,3995)
  Bottom Layer w10: D1.4 2535.98,3994.02 3024.02,3994.02 v1(3025,3995) ; P4.4 3133.83,3355 3185,3406.17 v1(3185,3795)
SET: B4.7 P11.3 R16.1 R17.1 | length 1069.9
  Top Layer w10: P11.3 3074.39,4349.39 3074.39,4378.24 3282.6,4586.46 B4.7
  Bottom Layer w10: R17.1 2900,4295 2945,4340 P11.3 3135,4340 3200.32,4274.68 3200.32,4010 R16.1
TX0: B4.12 P9.3 P12.7 | length 1311.8
  Top Layer w10: B4.12 3995.2,4586.46 4094.26,4487.39 4094.26,4435.74 P12.7
  Bottom Layer w10: P9.3 3515.98,3995.98 3890.98,3995.98 4149.49,4254.49 4149.49,4256.78 4173.22,4280.51 4175.51,4280.51 4190,4295 P12.7
TX1: B4.6 P6.4 P11.4 | length 2568.8
  Top Layer w10: P11.4 3077.09,4440 3282.6,4645.51 B4.6 3306.22,4645.51 3380,4571.73 3380,2575 P6.4
VDD3.3V: B4.1 C7.1 C8.1 P11.9 R7.2 R8.1 R9.1 R11.1 | length 2663.7
  Top Layer w10: R9.1 R11.1 2670.24,4184.76 v1(2668.93,4186.07) ; C7.1 2900.82,4186.07 v1(2668.93,4186.07) ; C8.1 2903.21,4437.5 2782.5,4437.5 v1(2780,4435) 2668.93,4323.93 v1(2668.93,4186.07) ; P11.9 3293.62,4940 B4.1
  Bottom Layer w10: R7.2 1988.84,4400 2745,4400 v1(2780,4435) 2825.24,4480.24 R8.1 2826.22,4505 2826.22,4546.22 2914.11,4634.11 2914.11,4789.11 P11.9
VUSB: J6.1 R6.2 | length 266
  Top Layer w10: J6.1 2160.79,4799.21 2205,4755 v1(2260,4755)
  Bottom Layer w10: v1(2260,4755) 2310,4805 R6.2
pads on no net: S1.1
copper on no net: | length 5464.9
  Top Layer w10: 873.38,2465.91 893.26,2405.88 ; 878.15,4945.91 898.26,5005.88 ; 883.26,2405.9 903.26,2405.86 ; 888.26,5005.9 908.26,5005.86 ; 895,3310 893.26,2405.88 ; 896.52,4101.75 898.26,5005.88 ; 913.38,2465.84 893.26,2405.88 ; 918.15,4945.84 898.26,5005.88 ; 1004.65,5130.18 1004.65,5150.18 ; 1064.65,5120.18 1004.65,5140.18 ; 1064.65,5160.18 1004.65,5140.18 ; 2540,5140.18 1004.65,5140.18 ; 2794.29,5140.18 4329.65,5140.18 ; 4269.65,5120.18 4329.65,5140.18 ; 4269.65,5160.18 4329.65,5140.18 ; 4329.65,5130.18 4329.65,5150.18

## Polygon pours and split planes (outlines as drawn)
GND on Bottom Layer "GND_L02_P000" (solid, pour order 0): 1000,2400 4325,2400 4325,5000 1000,5000
GND on Top Layer "GND_L01_P001" (solid, pour order 1): 1000,2400 4325,2400 4325,5000 1000,5000

## Other copper
Top Layer:
  text "3325 (mil)" at 2550,5115 h60
  text "2600.005 (mil)" at 931.01,3319.93 h60 r89.89

## Silkscreen, mask and mechanical layers (free items; w line width, h text height)
Top Overlay:
  text "5V" at 3850,3775 h60
  text "GND" at 3850,3675 h60
  text "3.3V" at 3155,3630 h60
  text "DO" at 3850,3575 h60
  text "GND" at 3155,3530 h60
  text "AO" at 3855,3480 h60
  text "SCL" at 3155,3430 h60
  text "SDA" at 3155,3325 h60
  text "3.3V" at 3170,3045 h60
  text "GND" at 3175,2935 h60
  text "GND" at 3860,2905 h60
  text "SCL" at 3170,2845 h60
  text "AO" at 3860,2810 h60
  text "SDA" at 3170,2740 h60
  text "DO" at 3860,2710 h60
  text "5V" at 3860,2600 h60
Bottom Overlay:
  text "3.3V" at 3310,4910 h55
  text "IO0" at 4150,4910 h55
  text "EN" at 3210,4815 h55
  text "IO1" at 4155,4810 h55
  text "SCL" at 3250,4715 h55
  text "IO2" at 4155,4715 h55
  text "SDA" at 3260,4615 h55
  text "IO3" at 4155,4615 h55
  text "IO6" at 3250,4520 h55
  text "D+" at 4145,4515 h55
  text "D-" at 4145,4415 h55
  text "IO7" at 3250,4410 h55
  text "IO8" at 3255,4315 h55
  text "TXD" at 4150,4310 h55
  text "IO9" at 3260,4215 h55
  text "RXD" at 4135,4210 h55
  text "GND" at 3265,4115 h55
  text "IO10" at 4150,4110 h60
  text "GND" at 2265,3925 h60 r90
  text "5V" at 2375,3925 h60 r90
  text "SCL" at 2470,3925 h60 r90
  text "SDA" at 2580,3920 h60 r90
  text "GND" at 3250,3835 h60 r90
  text "TX" at 3550,3835 h60 r90
  text "RESET" at 3655,3835 h60 r90
  text "5V" at 3140,3830 h60 r90
  text "SET" at 3355,3830 h60 r90
  text "RX" at 3455,3830 h60 r90
  text "3.3V" at 2830,3705 h60 r90
  text "5V" at 2725,3685 h60 r90
  text "GND" at 2945,3685 h60 r90
  text "DIY Air Quality Monitor 1.1" at 1720,3455 h60 r90
  text "2023/01/12" at 1840,3445 h60 r90
  text "5V" at 3310,2650 h60 r90
  text "TX" at 3405,2645 h60 r90
  text "RX" at 3510,2645 h60 r90
  text "GND" at 3215,2555 h60
Mechanical 1:
  the board outline again, w10